# EAGLE board XCarriage (EAGLE 9.6.2)
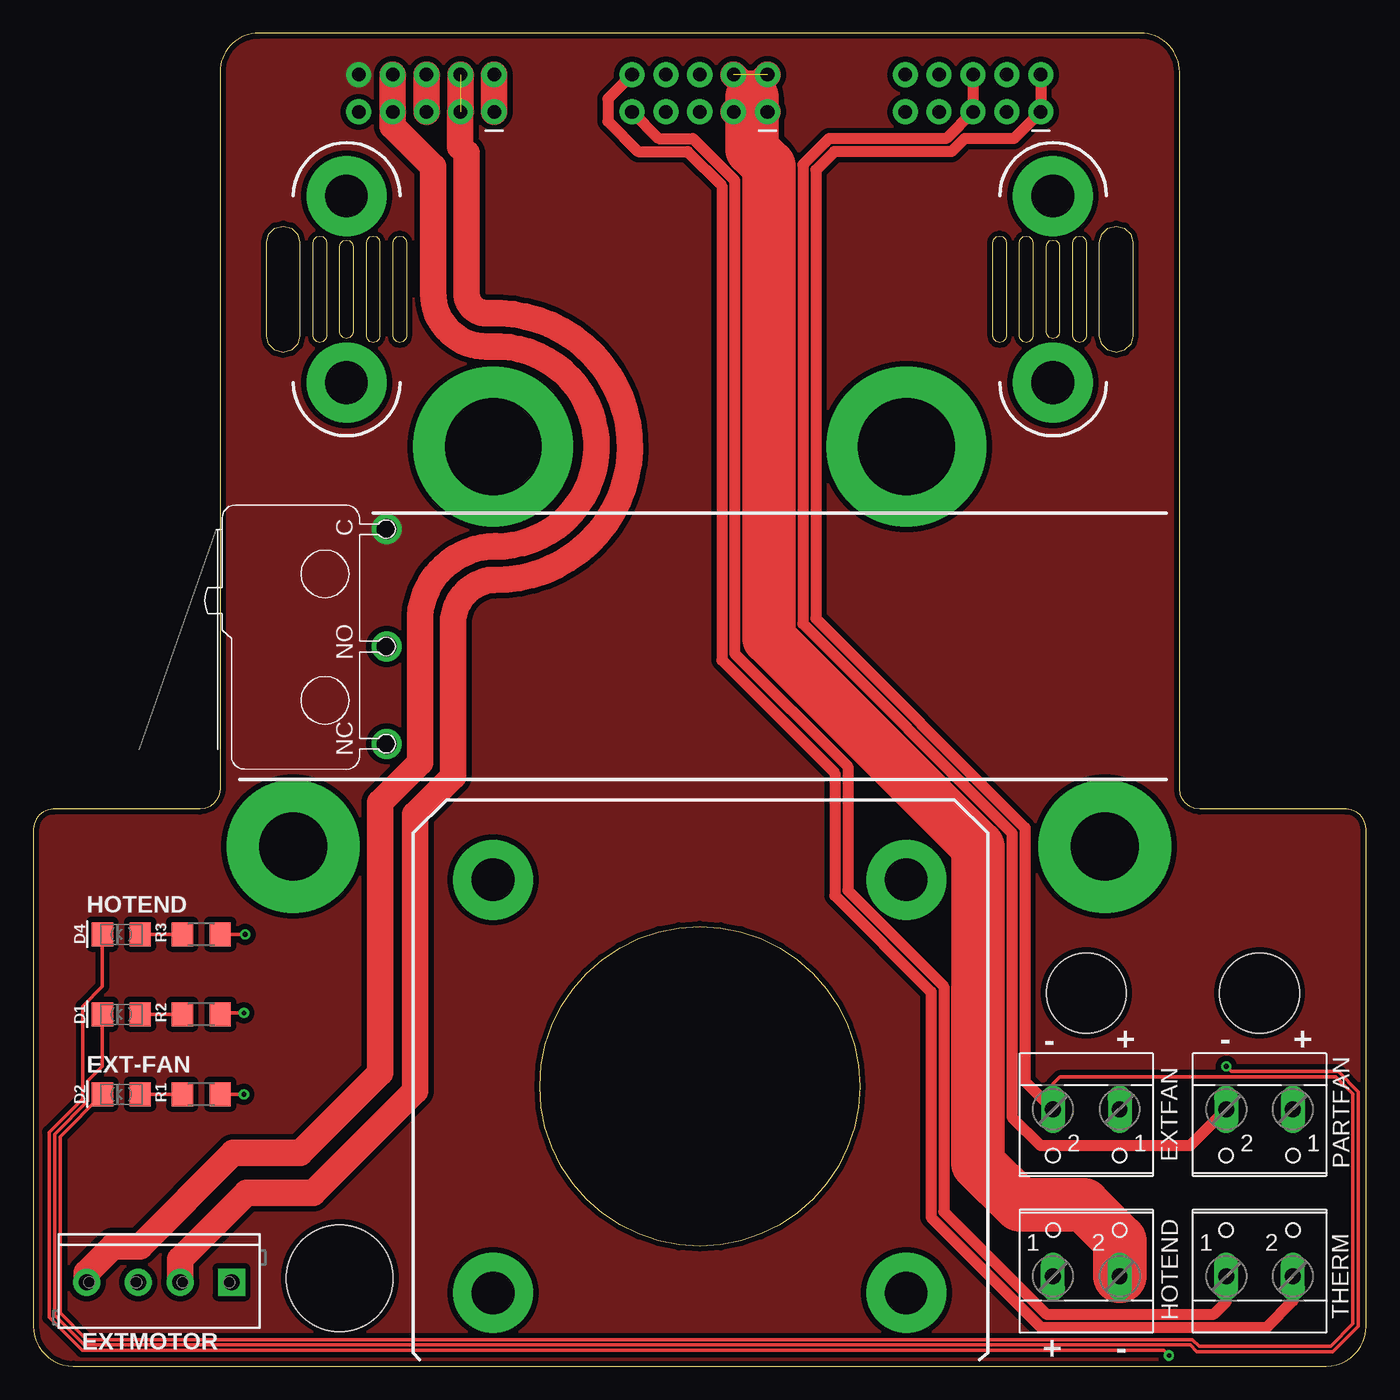
[diagram p0: board, top side]
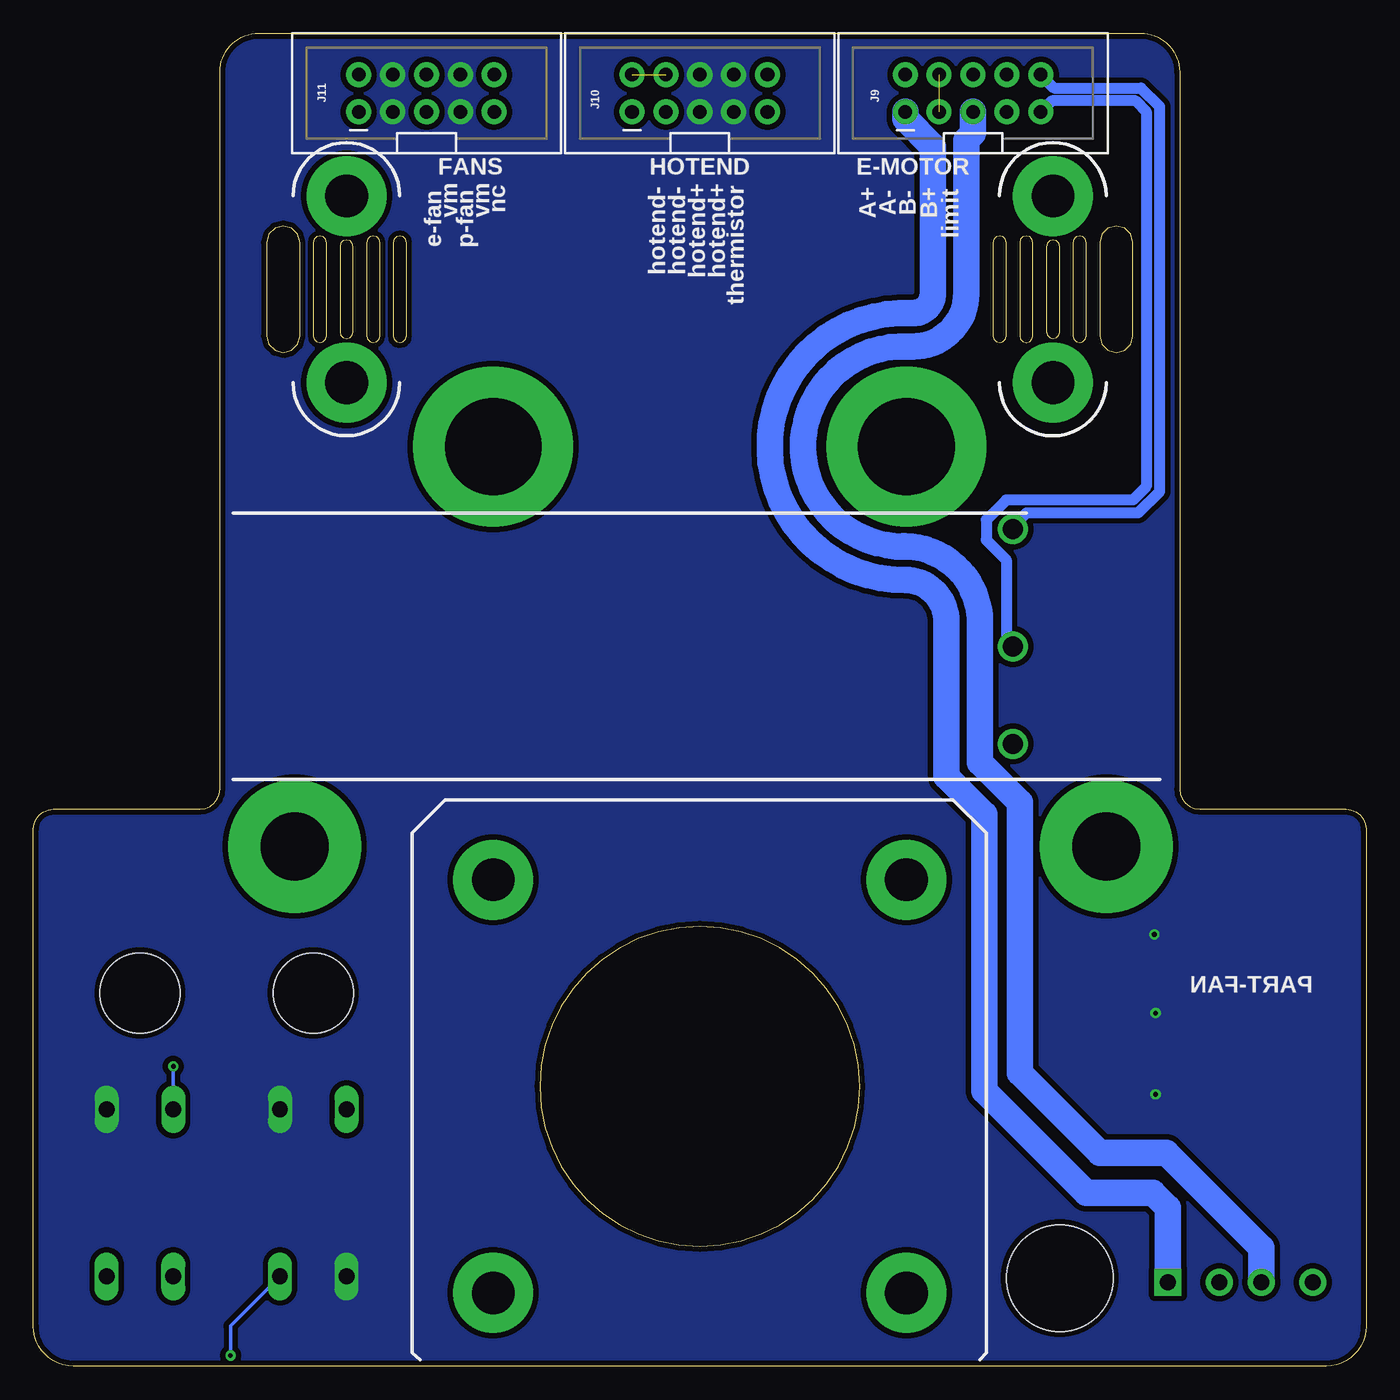
[diagram p1: board, bottom side, seen from below]

Size 100 x 100 mm. Coordinates in mm from the lower left corner, seen from the top.
Outline: 14,97.1 14,43.3 13.95,42.91 13.8,42.55 13.56,42.24 13.25,42 12.89,41.85 12.5,41.8 1.5,41.8 1.11,41.75 0.75,41.6 0.44,41.36 0.2,41.05 0.05,40.69 0,40.3 0,3 0.03,2.61 0.1,2.22 0.23,1.85 0.4,1.5 0.62,1.17 0.88,0.88 1.17,0.62 1.5,0.4 1.85,0.23 2.22,0.1 2.61,0.03 3,0 97,0 97.39,0.03 97.78,0.1 98.15,0.23 98.5,0.4 98.83,0.62 99.12,0.88 99.38,1.17 99.6,1.5 99.77,1.85 99.9,2.22 99.97,2.61 100,3 100,40.3 99.95,40.69 99.8,41.05 99.56,41.36 99.25,41.6 98.89,41.75 98.5,41.8 87.5,41.8 87.11,41.85 86.75,42 86.44,42.24 86.2,42.55 86.05,42.91 86,43.3 86,97.1 arc90 83.1,100 16.9,100 arc90 14,97.1
Outline: 58.48,29.48 59.52,28.3 60.39,27 61.09,25.59 61.59,24.11 61.9,22.57 62,21 61.9,19.43 61.59,17.89 61.09,16.41 60.39,15 59.52,13.7 58.48,12.52 57.3,11.48 56,10.61 54.59,9.91 53.11,9.41 51.57,9.1 50,9 48.43,9.1 46.89,9.41 45.41,9.91 44,10.61 42.7,11.48 41.52,12.52 40.48,13.7 39.61,15 38.91,16.41 38.41,17.89 38.1,19.43 38,21 38.1,22.57 38.41,24.11 38.91,25.59 39.61,27 40.48,28.3 41.52,29.48 42.7,30.52 44,31.39 45.41,32.09 46.89,32.59 48.43,32.9 50,33 51.57,32.9 53.11,32.59 54.59,32.09 56,31.39 57.3,30.52 58.48,29.48
Outline: 21.07,77.05 21,77.3 21,84.3 21.07,84.55 21.25,84.73 21.5,84.8 21.75,84.73 21.93,84.55 22,84.3 22,77.3 21.93,77.05 21.75,76.87 21.5,76.8 21.25,76.87 21.07,77.05
Outline: 78.75,76.87 78.5,76.8 78.25,76.87 78.07,77.05 78,77.3 78,84.3 78.07,84.55 78.25,84.73 78.5,84.8 78.75,84.73 78.93,84.55 79,84.3 79,77.3 78.93,77.05 78.75,76.87
Outline: 76,77.6 76,84 76.07,84.25 76.25,84.43 76.5,84.5 76.75,84.43 76.93,84.25 77,84 77,77.6 76.93,77.35 76.75,77.17 76.5,77.1 76.25,77.17 76.07,77.35 76,77.6
Outline: 80.62,85.38 81.25,85.55 81.88,85.38 82.33,84.92 82.5,84.3 82.5,77.3 82.33,76.67 81.88,76.22 81.25,76.05 80.62,76.22 80.17,76.67 80,77.3 80,84.3 80.17,84.92 80.62,85.38
Outline: 18.12,85.38 18.75,85.55 19.38,85.38 19.83,84.92 20,84.3 20,77.3 19.83,76.67 19.38,76.22 18.75,76.05 18.12,76.22 17.67,76.67 17.5,77.3 17.5,84.3 17.67,84.92 18.12,85.38
Outline: 25,84.3 25.07,84.55 25.25,84.73 25.5,84.8 25.75,84.73 25.93,84.55 26,84.3 26,77.3 25.93,77.05 25.75,76.87 25.5,76.8 25.25,76.87 25.07,77.05 25,77.3 25,84.3
Outline: 23.5,84.5 23.75,84.43 23.93,84.25 24,84 24,77.6 23.93,77.35 23.75,77.17 23.5,77.1 23.25,77.17 23.07,77.35 23,77.6 23,84 23.07,84.25 23.25,84.43 23.5,84.5
Outline: 72,84.3 72.07,84.55 72.25,84.73 72.5,84.8 72.75,84.73 72.93,84.55 73,84.3 73,77.3 72.93,77.05 72.75,76.87 72.5,76.8 72.25,76.87 72.07,77.05 72,77.3 72,84.3
Outline: 27.75,84.73 27.93,84.55 28,84.3 28,77.3 27.93,77.05 27.75,76.87 27.5,76.8 27.25,76.87 27.07,77.05 27,77.3 27,84.3 27.07,84.55 27.25,84.73 27.5,84.8 27.75,84.73
Outline: 74.75,84.73 74.93,84.55 75,84.3 75,77.3 74.93,77.05 74.75,76.87 74.5,76.8 74.25,76.87 74.07,77.05 74,77.3 74,84.3 74.07,84.55 74.25,84.73 74.5,84.8 74.75,84.73
Copper layers (1*16): Top 0.035mm / dielectric 1.5mm / Bottom 0.035mm
Design rules "default *": minimum track width 6mil, minimum drill 0.35mm, track to track 6mil, track to pad 6mil, pad to pad 6mil, via to via 6mil, smd to smd 6mil, copper to edge 10mil, drill to drill 6mil, minimum pad ring 10mil, minimum via ring 8mil, stop-mask expansion 4mil, vias tented up to drill 0mil, thermal gap 10mil
Net classes: 0 default: width 0.203 mm, clearance 0.152 mm
Holes 6 mm at 92,28 79,28
Holes 8 mm at 23,6.6

## Footprints (pad centres in the part's own frame; a part is rotated, then mirrored left to right if it is on the bottom)
FKIT-LED-1206 = smd 1.6 x 1.803: A -1.422,0; C 1.422,0
W237-102 = drill 1.194 long: 1 -2.5,-1.27; 2 2.5,-1.27
SCREWTERMINAL-3.5MM-4_LOCK = drill 1.2 pad 2.032 square: 1 -0.178,0 | drill 1.2 pad 2.032: 2 3.678,0; 3 6.822,0; 4 10.678,0
2X5-SHROUDED_LOCK = drill 1.016 pad 1.88: 1 -1.397,5.08; 2 1.397,5.08; 3 -1.397,2.54; 4 1.397,2.54; 5 -1.397,0; 6 1.397,0; 7 -1.397,-2.54; 8 1.397,-2.54; 9 -1.397,-5.08; 10 1.397,-5.08
R1206 = smd 1.6 x 1.803: 1 -1.422,0; 2 1.422,0
LEVERMICROPCB-LEFTANGLE = drill 1.5: C 7.3,-7.1; NC -8.8,-7.1; NO -1.5,-7.1

## Placement (x,y rotation side)
D1  [FKIT-LED-1206]  6.6,26.4 180 top
D2  [FKIT-LED-1206]  6.6,20.4 180 top
D4  [FKIT-LED-1206]  6.6,32.4 180 top
EXTFAN  [W237-102]  79,18 180 top
EXTMOTOR  [SCREWTERMINAL-3.5MM-4_LOCK]  14.7,6.3 180 top
HOTEND  [W237-102]  79,8 0 top
J9  [2X5-SHROUDED_LOCK]  29.5,95.5 90 bottom
J10  [2X5-SHROUDED_LOCK]  50,95.5 90 bottom
J11  [2X5-SHROUDED_LOCK]  70.5,95.5 90 bottom
PARTFAN  [W237-102]  92,18 180 top
R1  [R1206]  12.6,20.4 0 top
R2  [R1206]  12.6,26.4 0 top
R3  [R1206]  12.6,32.4 0 top
THERM  [W237-102]  92,8 0 top
XENDSTOP  Lever Microswitch Leftangle PCB mount, with Roller style lever, with a red roller  [LEVERMICROPCB-LEFTANGLE]  19.4,55.5 90 top

## Library data of the parts
D1 D2 D4 = SparkFun-LED
EXTFAN HOTEND PARTFAN THERM = con-wago-500; MPN: 237-102; OC_FARNELL: unknown; OC_NEWARK: 70K9898
EXTMOTOR = SparkFun-Connectors
J9-J11 = SparkFun-Connectors; PROD_ID: CONN-08671; SF_ID: PRT-08506
R1-R3 = rcl; SPICEPREFIX: R
XENDSTOP = Lever Microswitch Right Angle

## Nets
_E-ENDSTOP-C1: J9.9 XENDSTOP.NO
AGND: J10.9 THERM.1
D69/ADC15/TH1_HOTEND: J10.10 THERM.2
E-FAN-NEG: D2.C EXTFAN.2 J11.1 J11.2
EOUT-A+: EXTMOTOR.1 J9.1 J9.2
EOUT-A-: EXTMOTOR.2 J9.3 J9.4
EOUT-B+: EXTMOTOR.4 J9.7 J9.8
EOUT-B-: EXTMOTOR.3 J9.5 J9.6
GND: J9.10 XENDSTOP.C
HOTEND-NEG1: D4.C HOTEND.2 J10.1 J10.2 J10.3 J10.4
N$12: D2.A R1.1
N$48: D1.A R2.1
N$49: D4.A R3.1
PART-FAN-NEG: D1.C J11.5 J11.6 PARTFAN.2
SPARE1: J11.10
SPARE2: J11.9
VM: EXTFAN.1 HOTEND.1 J10.5 J10.6 J10.7 J10.8 J11.3 J11.4 J11.7 J11.8 PARTFAN.1 R1.2 R2.2 R3.2

## Tracks (layer width: path | path; a pad name or v marks a point on that pad's centre or on a via)
_E-ENDSTOP-C1
  Bottom 0.813: XENDSTOP.NO 27,54.5 27,60.5 28.5,62 28.5,63.5 27,65 17.5,65 16.5,66 16.5,94.14 17.3,94.93 23.59,94.93 J9.9
AGND
  Top 0.813: J10.9 46.92,92.1 49.48,92.1 52.62,88.96 52.62,53.48 61.1,45 61.1,35.7 68.32,28.48 68.32,11.58 76,3.9 88.57,3.9 89.5,4.83 THERM.1
D69/ADC15/TH1_HOTEND
  Top 0.813: J10.10 43.1,95.08 43.1,93.4 45.37,91.14 49.08,91.14 51.65,88.56 51.65,52.98 60.13,44.5 60.13,35.3 67.35,28.08 67.35,11.18 75.6,2.94 92.53,2.94 94.5,4.9 THERM.2
E-FAN-NEG
  Top 0.254: D2.C 2,17.22 2,4 4,2 86.97,2 87.47,1.51 97.33,1.51 98.99,3.17 98.99,20.43 97.72,21.7 77,21.7 76.5,21.2 EXTFAN.2
  Top 0.813: EXTFAN.2 74.4,21.37 74.4,40.4 58.7,56.1 58.7,89.73 60.1,91.14 68.9,91.14 69.86,92.1 73.58,92.1 J11.1 J11.2
EOUT-A+
  Top 2: J9.2 J9.1
  Bottom 2: EXTMOTOR.1 14.87,11.87 16,13 21,13 28.65,20.65 28.65,41.41 31.5,44.26 31.5,55.5 arc-90 34.35,59 34.5,59 arc180 35,79 34.03,79 arc-90 32.5,80.53 32.5,91.5 34.58,93.58 J9.1
EOUT-A-  (1 unrouted)
  Top 2: EXTMOTOR.2 11.02,8.02 16,13 21,13 28.65,20.65 28.65,41.41 31.5,44.26 31.5,55.5 arc-90 34.5,59 arc180 35,79 34,79 arc-90 32.5,80.5 32.5,91 32,91.5 32,94.06 J9.3 J9.4
EOUT-B+
  Top 2: EXTMOTOR.4 4,6.32 4,7 6,9 8,9 15,16 20,16 26,22 26,42.3 29,45.3 29,56.3 arc-90 35.2,61.5 34.5,61.5 arc180 35,76.5 34,76.5 arc-90 30,80.5 30,90 26.96,93.04 J9.7 J9.8
EOUT-B-
  Top 2: J9.6 J9.5
  Bottom 2: EXTMOTOR.3 7.87,8.87 15,16 20,16 26,22 26,42.3 29,45.3 29,56.3 arc-90 35.2,61.5 34.5,61.5 arc180 35,76.5 34,76.5 arc-90 30,80.5 30,92 29.5,92.5 J9.5
GND
  Bottom 0.813: J9.10 23.42,95.9 16.9,95.9 15.5,94.5 15.5,65.64 17.1,64.03 25.46,64.03 26.5,63 XENDSTOP.C
  pour Top (isolate 0.406, no thermals): 14,100 86,100 86,44 88,42 100,42 100,0 0,0 0,42 13,42 14,43
HOTEND-NEG1  (via drill 0.35)  (1 unrouted)
  Top 0.254: D4.C 5.18,28.5 3.69,27.01 3.69,20.06 1.19,17.56 1.19,3.66 3.66,1.19 84.81,1.19 v85.2,0.8
  Top 2: J10.4 54.32,95.12 54.32,94.86 J10.1 | J10.2 53.9,95.72 53.9,95.2 53.64,95.2 J10.3
  Top 4: HOTEND.2 81.5,9.4 78.8,12.1 74,12.1 70.88,15.22 70.88,38.94 55.18,54.64 55.18,90.02 53.9,91.3 53.9,95.2
  Bottom 0.254: HOTEND.2 85.2,3.03 v85.2,0.8
N$12
  Top 0.254: D2.A R1.1
N$19  (via drill 5.1 pad 10)
  other vias: 80.4,39
N$20  (via drill 3.2 pad 6)
  other vias: 65.5,5.5
N$22  (via drill 3.2 pad 6)
  other vias: 34.5,5.5
N$23  (via drill 5.1 pad 10)
  other vias: 19.5,39
N$24  (via drill 3.2 pad 6)
  other vias: 34.5,36.5
N$25  (via drill 3.2 pad 6)
  other vias: 65.5,36.5
N$26  (via drill 7.25 pad 12)
  other vias: 34.5,69
N$29  (via drill 7.25 pad 12)
  other vias: 65.5,69
N$43  (via drill 3.2 pad 6)
  other vias: 76.5,73.8
N$44  (via drill 3.2 pad 6)
  other vias: 76.5,87.8
N$45  (via drill 3.2 pad 6)
  other vias: 23.5,87.8
N$46  (via drill 3.2 pad 6)
  other vias: 23.5,73.8
N$48
  Top 0.254: D1.A R2.1
N$49
  Top 0.254: D4.A R3.1
PART-FAN-NEG  (via drill 0.35)
  Top 0.254: D1.C 5.18,22.5 4.1,21.42 4.1,19.89 1.59,17.39 1.59,3.83 3.83,1.59 86.81,1.59 87.3,1.1 97.5,1.1 99.4,3 99.4,20.6 97.89,22.11 89.89,22.11 v89.5,22.5
  Top 0.813: PARTFAN.2 86.79,16.56 75.56,16.56 73.44,18.68 73.44,40 57.73,55.7 57.73,90.14 59.7,92.1 68.5,92.1 J11.5 J11.6
  Bottom 0.254: v89.5,22.5 PARTFAN.2
VM  (via drill 0.35)
  Top 0.254: R3.2 v15.9,32.4 | R2.2 14.12,26.5 v15.8,26.5 | R1.2 v15.8,20.4
  pour Bottom (isolate 0.406, no thermals): 14,100 86,100 86,44 88,42 100,42 100,0 0,0 0,42 13,42 14,43

## Text on the board
tPlace: HOTEND | - | + | - | + | EXT-FAN | + | -
bPlace: E-MOTOR | HOTEND | FANS | nc | vm | vm | B+ | B- | A- | A+ | limit | p-fan | e-fan | hotend+ | hotend+ | hotend- | hotend- | thermistor | PART-FAN